# EAGLE board attiny45-microcontrol-v4.0 (EAGLE 6.5.0)
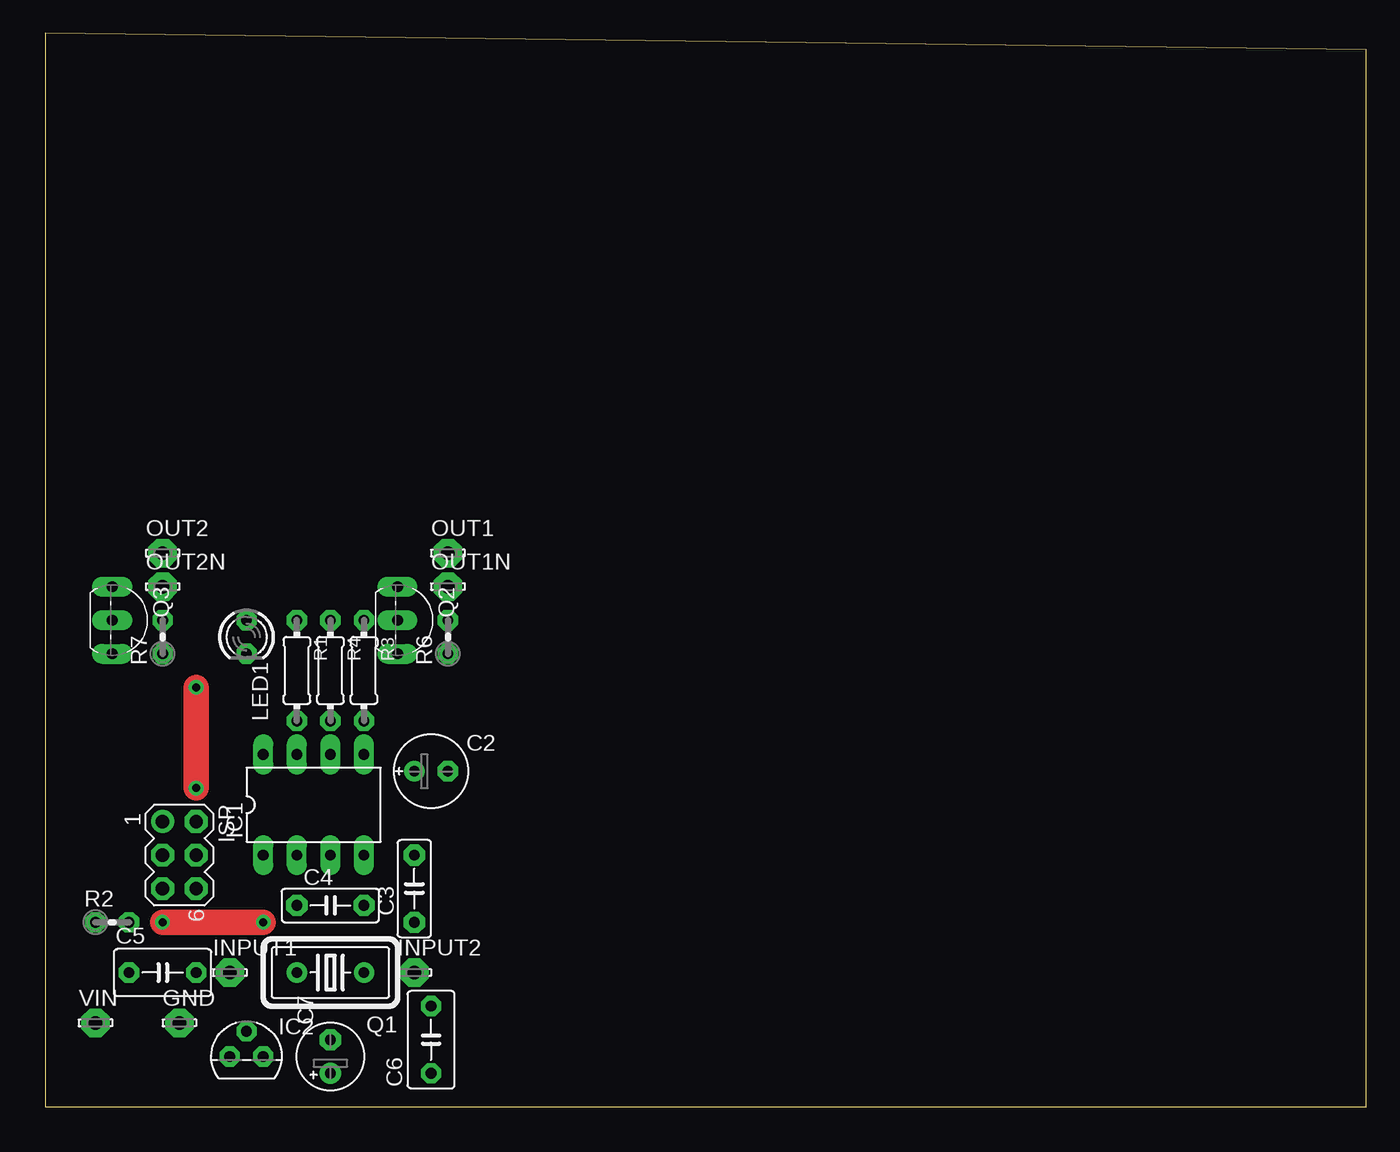
[diagram p0: board, top side]
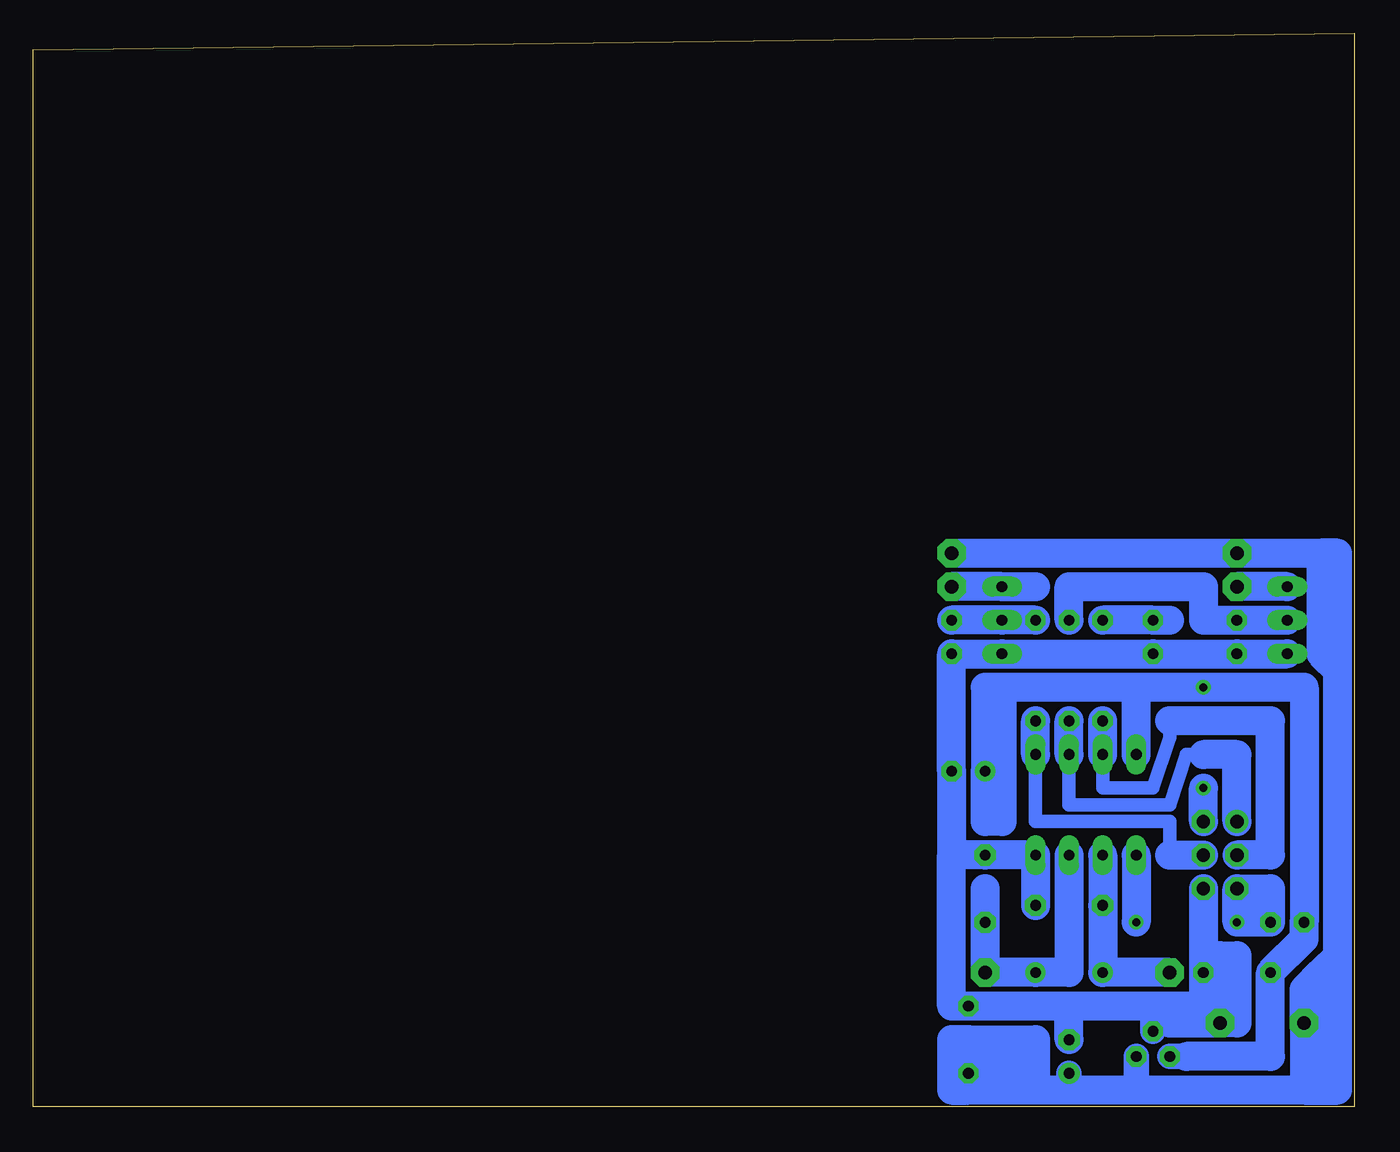
[diagram p1: board, bottom side, seen from below]

Size 100 x 81.27 mm. Coordinates in mm from the lower left corner, seen from the top.
Outline: 0,0 100,0 100,80 0,81.27 0,0
Copper layers (1*16): Top 0.035mm / dielectric 1.5mm / Bottom 0.035mm
Design rules "default *": minimum track width 10mil, minimum drill 24mil, track to track 8mil, track to pad 8mil, pad to pad 8mil, via to via 8mil, smd to smd 8mil, copper to edge 40mil, drill to drill 8mil, minimum pad ring 14mil, minimum via ring 10mil, stop-mask expansion 4mil, vias tented up to drill 0mil, thermal gap 10mil
Net classes: 0 default: clearance 0.355 mm

## Footprints (pad centres in the part's own frame; a part is rotated, then mirrored left to right if it is on the bottom)
E2,5-6E = drill 0.813 pad 1.575: + -1.27,0 | drill 0.813 pad 1.575 octagon: - 1.27,0
C5B2.5 = drill 0.813 pad 1.6 octagon: 1 -2.54,0; 2 2.54,0
C050-035X075 = drill 0.813 octagon: 1 -2.54,0; 2 2.54,0
E2,5-5 = drill 0.813 pad 1.6: + -1.27,0 | drill 0.813 pad 1.6 octagon: - 1.27,0
LSP10 = drill 1.016 pad 2.159 octagon: MP 0,0
DIL08 = drill 0.813 long: 1 -3.81,-3.81; 2 -1.27,-3.81; 3 1.27,-3.81; 4 3.81,-3.81; 5 3.81,3.81; 6 1.27,3.81; 7 -1.27,3.81; 8 -3.81,3.81
TO92 = drill 0.813 octagon: 1 -1.27,0; 2 0,1.905; 3 1.27,0
MA03-2 = drill 1.016: 1 -2.54,-1.27 | drill 1.016 octagon: 2 -2.54,1.27; 3 0,-1.27; 4 0,1.27; 5 2.54,-1.27; 6 2.54,1.27
LED3MM = drill 0.813 octagon: A -1.27,0; K 1.27,0
HC18U-V = drill 0.813: 1 -2.54,0; 2 2.54,0
TO92-EBC = drill 0.813 long: B 0,-1.27; C -2.54,-1.27; E 2.54,-1.27
0204/7 = drill 0.813 octagon: 1 -3.81,0; 2 3.81,0
0204V = drill 0.813 octagon: 1 -1.27,0; 2 1.27,0

## Placement (x,y rotation side)
C2  100u  [E2,5-6E]  29.21,25.4 0 top
C3  18nf  [C5B2.5]  27.94,16.51 90 top
C4  18nf  [C5B2.5]  21.59,15.24 0 top
C5  100n  [C050-035X075]  8.89,10.16 0 top
C6  100n  [C050-035X075]  29.21,5.08 90 top
C7  100y  [E2,5-5]  21.59,3.81 90 top
GND  LSP10  [LSP10]  10.16,6.35 0 top
IC1  ATtiny13V  [DIL08]  20.32,22.86 0 top
IC2  7805L  [TO92]  15.24,3.81 0 top
INPUT1  LSP10  [LSP10]  13.97,10.16 0 top
INPUT2  LSP10  [LSP10]  27.94,10.16 0 top
ISP  isp 1  [MA03-2]  10.16,19.05 270 top
LED1  ROT  [LED3MM]  15.24,35.56 270 top
OUT1  LSP10  [LSP10]  30.48,41.91 0 top
OUT1N  LSP10  [LSP10]  30.48,39.37 0 top
OUT2  LSP10  [LSP10]  8.89,41.91 0 top
OUT2N  LSP10  [LSP10]  8.89,39.37 0 top
Q1  8mhz  [HC18U-V]  21.59,10.16 180 top
Q2  BC548  [TO92-EBC]  27.94,36.83 270 top
Q3  BC548  [TO92-EBC]  6.35,36.83 270 top
R1  390  [0204/7]  19.05,33.02 270 top
R2  10k  [0204V]  5.08,13.97 0 top
R3  1k  [0204/7]  24.13,33.02 270 top
R4  1k  [0204/7]  21.59,33.02 270 top
R6  10k  [0204V]  30.48,35.56 90 top
R7  10k  [0204V]  8.89,35.56 90 top
VIN  LSP10  [LSP10]  3.81,6.35 0 top

## Library data of the parts
C2 C5-C7 R1-R4 R6 R7 = rcl
C3 C4 = capacitor-wima
GND INPUT1 INPUT2 OUT1 OUT1N OUT2 OUT2N VIN = solpad
IC1 = avr
IC2 = linear
ISP = con-lstb
LED1 = led
Q1 = crystal; OC_FARNELL: unknown; OC_NEWARK: unknown
Q2 Q3 = transistor-npn

## Nets
GND: C2.- C3.2 C4.2 C5.2 C6.2 C7.- GND.MP IC1.4 IC2.2 ISP.6 LED1.K Q2.E Q3.E R6.1 R7.1
N$1: Q2.B R3.1 R6.2
N$2: C4.1 IC1.2 INPUT1.MP Q1.2
N$3: IC1.1 ISP.5 R2.2
N$4: Q3.B R4.1 R7.2
N$5: IC1.7 ISP.3 R1.2
N$6: IC1.6 ISP.1 R4.2
N$7: LED1.A R1.1
N$8: C3.1 IC1.3 INPUT2.MP Q1.1
N$10: IC1.5 ISP.4 R3.2
N$12: OUT2N.MP Q3.C
N$13: OUT1N.MP Q2.C
N$14: C6.1 C7.+ IC2.3 OUT1.MP OUT2.MP VIN.MP
VCC: C2.+ C5.1 IC1.8 IC2.1 ISP.2 R2.1

## Tracks (layer width: path | path; a pad name or v marks a point on that pad's centre or on a via)
GND
  Bottom 1.778: 11.43,7.62 GND.MP
  Bottom 1.93: R7.1 Q3.E | 15.24,7.62 IC2.2 | GND.MP 10.16,11.43
  Bottom 2.184: 21.59,7.62 15.24,7.62 11.43,7.62 C5.2 11.43,11.43 | 21.59,7.62 C6.2 30.48,7.62 30.48,19.05 | C4.2 IC1.4 C3.2 30.48,19.05 | 30.48,19.05 C2.- R6.1 Q2.E R7.1 | LED1.K Q3.E | ISP.6 11.43,11.43 | C7.- 21.59,7.62 | 13.97,6.35 GND.MP 8.89,6.35 8.89,11.43 10.16,11.43 11.43,11.43
N$1
  Bottom 2.184: R3.1 Q2.B R6.2
N$2
  Bottom 2.184: IC1.2 C4.1 Q1.2 INPUT1.MP
N$3  (via drill 0.6)
  Top 1.93: v16.51,13.97 v8.89,13.97
  Bottom 1.93: R2.2 7.62,13.97
  Bottom 2.184: IC1.1 v16.51,13.97 | 7.62,13.97 7.62,15.24 | R2.2 v8.89,13.97 ISP.5 6.35,16.51 R2.2
N$4
  Bottom 2.184: Q3.B R7.2 11.43,36.83 11.43,39.37 21.59,39.37 R4.1
N$5
  Bottom 1.016: 13.97,29.21 13.97,27.94 15.24,24.13 19.05,24.13 IC1.7
  Bottom 2.184: ISP.3 6.35,19.05 6.35,29.21 13.97,29.21 | IC1.7 R1.2
N$6
  Bottom 1.016: IC1.6 21.59,22.86 13.97,22.86 12.7,26.67 11.43,26.67
  Bottom 2.184: IC1.6 R4.2 | ISP.1 8.89,26.67 11.43,26.67
N$7
  Bottom 2.184: 13.97,36.83 LED1.A R1.1
N$8
  Bottom 2.184: IC1.3 21.59,10.16 Q1.1 INPUT2.MP C3.1 27.94,16.51
N$10
  Bottom 1.016: 13.97,19.05 13.97,21.59 24.13,21.59 IC1.5
  Bottom 2.184: 13.97,19.05 ISP.4 | IC1.5 R3.2
N$11
  Bottom 1.93: 2.54,8.89 2.54,2.54
N$12
  Bottom 2.184: Q3.C OUT2N.MP
N$13
  Bottom 2.184: OUT1N.MP Q2.C 24.13,39.37
N$14
  Bottom 1.016: 2.54,10.16 2.54,8.89
  Bottom 1.93: IC2.3 16.51,1.27 | C7.+ 21.59,1.27 | 29.21,1.27 C6.1 | 24.13,2.54 27.94,2.54 27.94,3.81 25.4,3.81
  Bottom 2.184: 2.54,41.91 OUT2.MP OUT1.MP 2.54,41.91 | 3.81,1.27 VIN.MP 3.81,8.89 2.54,10.16 1.27,11.43 | 3.81,1.27 16.51,1.27 21.59,1.27 29.21,1.27 30.48,1.27 30.48,5.08 29.21,5.08 | 1.27,11.43 1.27,33.02 | 1.27,33.02 1.27,41.91 2.54,41.91 | 2.54,41.91 2.54,34.29 1.27,33.02 | C6.1 29.21,5.08 | 29.21,5.08 24.13,5.08 24.13,2.54 | 3.81,1.27 2.54,1.27 | 2.54,1.27 1.27,1.27 1.27,11.43 | 2.54,1.27 2.54,8.89
VCC  (via drill 0.6)
  Top 1.93: v11.43,31.75 v11.43,24.13
  Bottom 1.778: 3.81,31.75 v11.43,31.75 16.51,31.75 27.94,31.75
  Bottom 1.93: IC2.1 12.7,3.81
  Bottom 2.184: ISP.2 v11.43,24.13 | IC1.8 16.51,31.75 | 26.67,30.48 26.67,21.59 27.94,21.59 C2.+ 27.94,31.75 3.81,31.75 R2.1 3.81,12.7 C5.1 6.35,3.81 12.7,3.81